# Allegro board ex2_rlc.brd
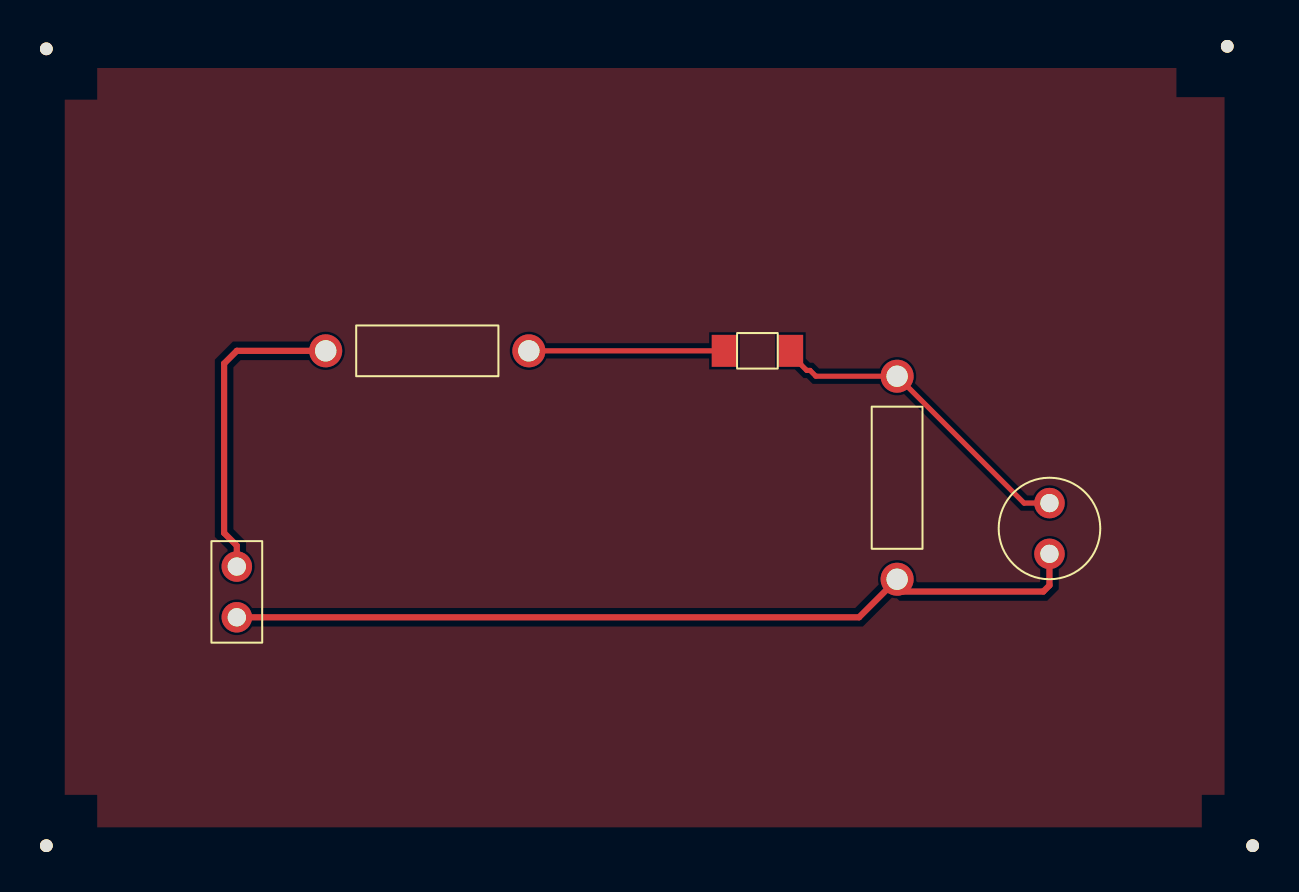
[diagram p0: board, top side]
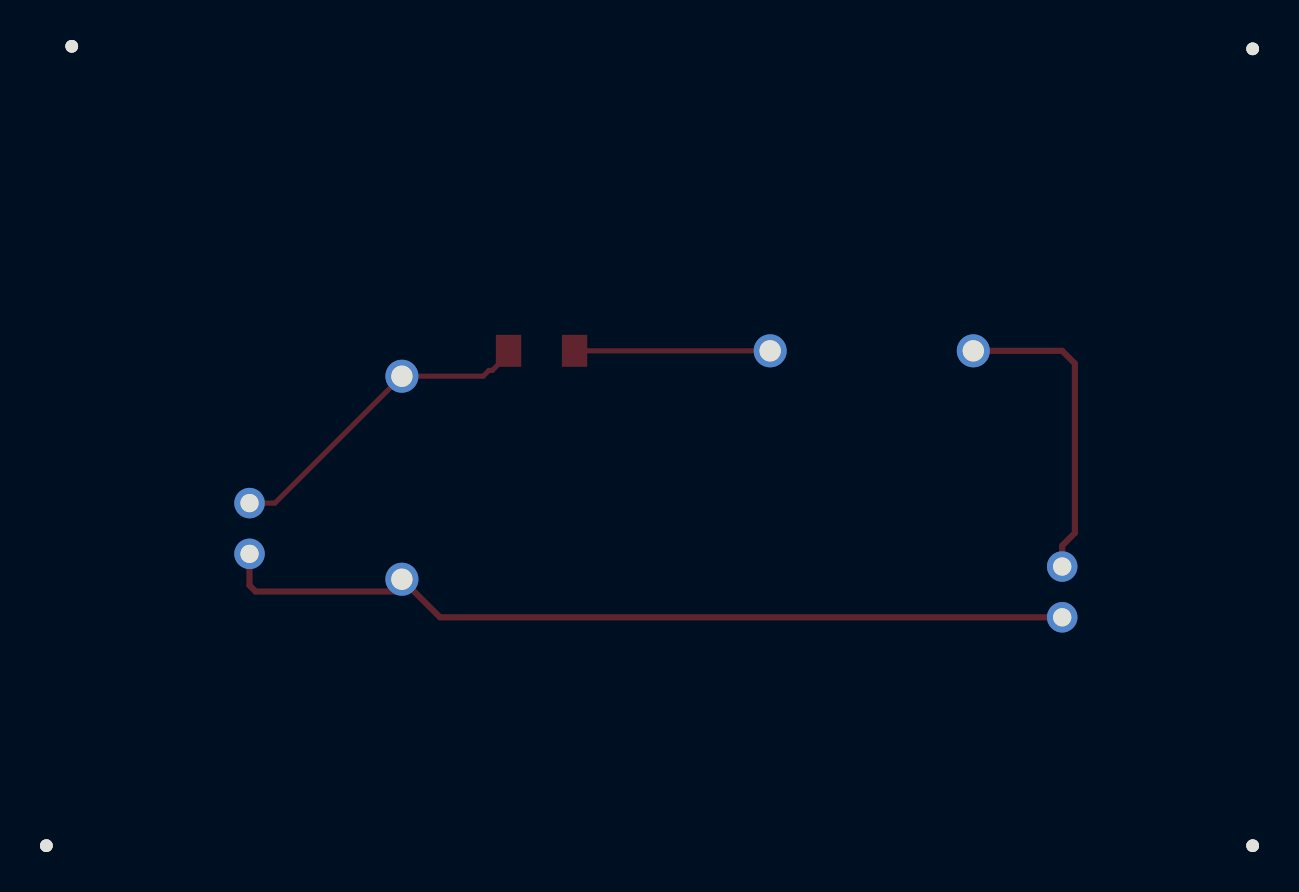
[diagram p1: board, bottom side, seen from below]

No outline. copper layers: TOP, BOTTOM. Coordinates in mm from the lowest, leftmost part position.

## Design rules (mm)
net group BASENET: nets KKKK N00101
net group POWERNET: nets GND VCC

## Placement (name value [footprint] x y rotation side)
C1  1u  [CAP196]  50.16 17.15 180 top
J1  CON2  [JUMPER2]  9.53 11.43 90 top
L1  100n  [SMDRES]  35.56 24.77 0 top
NOREF  -  [unnamed]  0 0 0 top
NOREF#2  -  [unnamed]  60.33 0 0 top
NOREF#3  -  [unnamed]  0 39.88 0 top
NOREF#4  -  [unnamed]  59.06 40.01 0 top
R1  330  [RES400]  24.13 24.77 90 top
R2  330  [RES400]  42.55 23.49 180 top

## Library data of the parts
C1 = CAP NP: Tolerance: ***; User Part Number: ***
J1 = CON2: User Part Number: ***
L1 = INDUCTOR: Tolerance: ***; User Part Number: ***
R1 R2 = R: Tolerance: ***; User Part Number: ***

## Footprints (pads in the part's own frame, mm; a bottom-side part is the same pattern mirrored in y, then rotated)
CAP196
  round 1.524 hole 0.914: 1(0,0) 2(0,2.54)
JUMPER2
  round 1.524 hole 0.914: 1(0,0) 2(2.54,0)
RES400
  round 1.651 hole 1.067: 1(0,0) 2(0,10.16)
SMDRES
  rect 1.27x1.6 smd: 1(-1.651,0) 2(1.651,0)
unnamed
  round 0.635 hole 3.175 unplated: (0,0)

## Nets
GND: C1.2 J1.1 R2.2
VCC: J1.2 R1.2
KKKK: L1.1 R1.1
N00101: C1.1 L1.2 R2.1

## Routing (per net, layer and track width the routed paths; a pad name or vN(x,y) marks a point on that pad's centre or on a via; arc(x,y) is an arc through that point)
GND: length 43.6
  TOP w0.308: 50.16,14.6 50.16,13.03 49.86,12.72 42.85,12.72 42.55,13.03 R2.2 40.64,11.43 J1.1
VCC: length 15.8
  TOP w0.308: R1.2 9.53,24.77 8.89,24.13 8.89,15.65 9.53,15.01 J1.2
KKKK: length 9.8
  TOP w0.254: L1.1 R1.1
N00101: length 16.2
  TOP w0.254: C1.1 48.9,17.15 R2.1 38.48,23.49 38.19,23.78 38.03,23.78 37.21,24.6 L1.2

## Copper pours and planes (outline as drawn; the poured copper is in the pictures)
Net_2 on TOP: 58.92,0.92 0.92,0.92 0.92,38.92 58.92,38.92

## Text on the board
COMPVAL_TYPE_TOP: FIGURE | SIZE | 0.914 | 1.067 | 3.175 | DRILL CHART: TOP to BOTTOM | ALL UNITS ARE IN MILLIMETERS | PLATED | NON-PLATED | QTY | 4
